# EAGLE board Helder ll - Placa Redundante.V6 v2 (EAGLE 9.7.0)

Size 100 x 100 mm. Coordinates in mm from the lower left corner, seen from the top.
Outline: circle at 50,50 radius 50
Copper layers (1*16): Top / Bottom
Stack-up Default Layer Stack: Top User Defined 0.035mm / Dielectric-1 User Defined 1.5mm / Bottom User Defined 0.035mm
Design rules: minimum copper width 6mil, minimum drill size 0.35mm, copper clearance wire_polygon to wire_polygon 6mil, copper clearance wire_polygon to pad_smd 6mil, copper clearance wire_polygon to via 6mil, copper clearance pad_smd to pad_smd 6mil, copper clearance pad_smd to via 6mil, copper clearance via to via 6mil, copper clearance smd to pad (same net) 6mil, copper clearance smd to via (same net) 6mil, copper clearance smd to smd (same net) 6mil, dimension clearance 40mil, via restrict clearance 0mil, restrict clearance 0mil, drill distance 6mil, keepout clearance 0mil

## Footprints (pad centres in the part's own frame; a part is rotated, then mirrored left to right if it is on the bottom)
MA06-1 = drill 1.016 long: 1 -6.35,0; 2 -3.81,0; 3 -1.27,0; 4 1.27,0; 5 3.81,0; 6 6.35,0
LEDRD254W60D565H860B_G = drill 0.981 pad 1.581: 1 -1.27,0; 2 1.27,0
LEDRD254W60D565H860B = drill 0.981 pad 1.581: 1 -1.27,0; 2 1.27,0
LEDRD254W60D565H860B_Y = drill 0.981 pad 1.581: 1 -1.27,0; 2 1.27,0
1X02/90 = drill 1.016 long: 1 -1.27,-3.81; 2 1.27,-3.81
PIEZO = drill 1 pad 1.6: 1 -3.5,0; 2 3.5,0
RESAD724W46L381D178B = drill 0.66 pad 1.26: 1 -3.62,0; 2 3.62,0
MODULE_ESP32_DEVKIT_V1 = drill 1.02 pad 2 square: 1 -12.7,15.515 | drill 1.02 pad 2: 2 -12.7,12.975; 3 -12.7,10.435; 4 -12.7,7.895; 5 -12.7,5.355; 6 -12.7,2.815; 7 -12.7,0.275; 8 -12.7,-2.265; 9 -12.7,-4.805; 10 -12.7,-7.345; 11 -12.7,-9.885; 12 -12.7,-12.425; 13 -12.7,-14.965; 14 -12.7,-17.505; 15 -12.7,-20.045; 16 12.7,-20.045; 17 12.7,-17.505; 18 12.7,-14.965; 19 12.7,-12.425; 20 12.7,-9.885; 21 12.7,-7.345; 22 12.7,-4.805; 23 12.7,-2.265; 24 12.7,0.275; 25 12.7,2.815; 26 12.7,5.355; 27 12.7,7.895; 28 12.7,10.435; 29 12.7,12.975; 30 12.7,15.515 | hole 3: -12.28,-23.475; 12.23,-23.475; 12.23,23.475; -12.28,23.475

## Placement (x,y rotation side)
BMP280  [MA06-1]  76.67,25.02 0 top
D1  LED_GREEN  [LEDRD254W60D565H860B_G]  11.9,38.57 180 top
D2  LED_RED  [LEDRD254W60D565H860B]  11.9,60.16 180 top
D3  LED_YELLOW  [LEDRD254W60D565H860B_Y]  11.9,48.73 180 top
JP1  [1X02/90]  88.1,50 90 top
JP2  [1X02/90]  88.1,60.16 90 top
LS1  PIEZO  [PIEZO]  50,13.17 0 top
R1  [RESAD724W46L381D178B]  22.06,48.73 180 top
R2  [RESAD724W46L381D178B]  22.06,60.16 180 top
R3  [RESAD724W46L381D178B]  22.06,38.57 180 top
U1  ESP32-DEVKIT-V1  [MODULE_ESP32_DEVKIT_V1]  50,50 0 top

## Library data of the parts
BMP280 = con-lstb; OC_FARNELL: unknown; OC_NEWARK: unknown
D1-D3 = Tinkercad; CATEGORY: Opto-Electronic; SUB-CATEGORY: LED
JP1 JP2 = pinhead
LS1 = Tinkercad
R1-R3 = Resistor; CATEGORY: Resistor; SUB-CATEGORY: Fixed
U1 = ESP32-DEVKIT-V1; AVAILABILITY: Not in stock; CHECK_PRICES: https://www.snapeda.com/parts/ESP32-DEVKIT-V1/Do+it/view-part/?ref=eda; DESCRIPTION: Dual core, Wi-Fi: 2.4 GHz up to 150 Mbits/s,BLE (Bluetooth Low Energy) and legacy Bluetooth, 32 bits, Up to 240 MHz; MF: Do it; MP: ESP32-DEVKIT-V1; PACKAGE: None; PRICE: None; SNAPEDA_LINK: https://www.snapeda.com/parts/ESP32-DEVKIT-V1/Do+it/view-part/?ref=snap

## Nets
CSB: BMP280.2
D5: LS1.2 U1.8
D12: D3.2 U1.27
D13: D1.2 U1.28
GND: BMP280.5 JP1.1 JP2.1 LS1.1 R1.1 R2.1 R3.1 U1.2 U1.29
N$1: D1.1 R3.2
N$2: D2.1 R2.2
N$3: D3.1 R1.2
SCL: BMP280.4 U1.14
SDA: BMP280.3 U1.11
SDO: BMP280.1
VCC1: BMP280.6 D2.2 JP1.2 JP2.2 U1.30

## Tracks (layer width: path | path; a pad name or v marks a point on that pad's centre or on a via)
D5  (1 unrouted)
D12  (1 unrouted)
D13  (1 unrouted)
GND  (8 unrouted)
N$1  (1 unrouted)
N$2  (1 unrouted)
N$3  (1 unrouted)
SCL  (1 unrouted)
SDA  (1 unrouted)
VCC1  (4 unrouted)